# Altium PCB AU0002A.PcbDoc
Units mil, origin at the board's own origin, x right, y up, seen from the top; angles counter-clockwise.
Board outline 1379.39 x 1738.17 mil, 2 copper layers (Top Layer, Bottom Layer), stack 61.7 mil thick; 8 components, 6 nets, 25 pads, 3 vias.
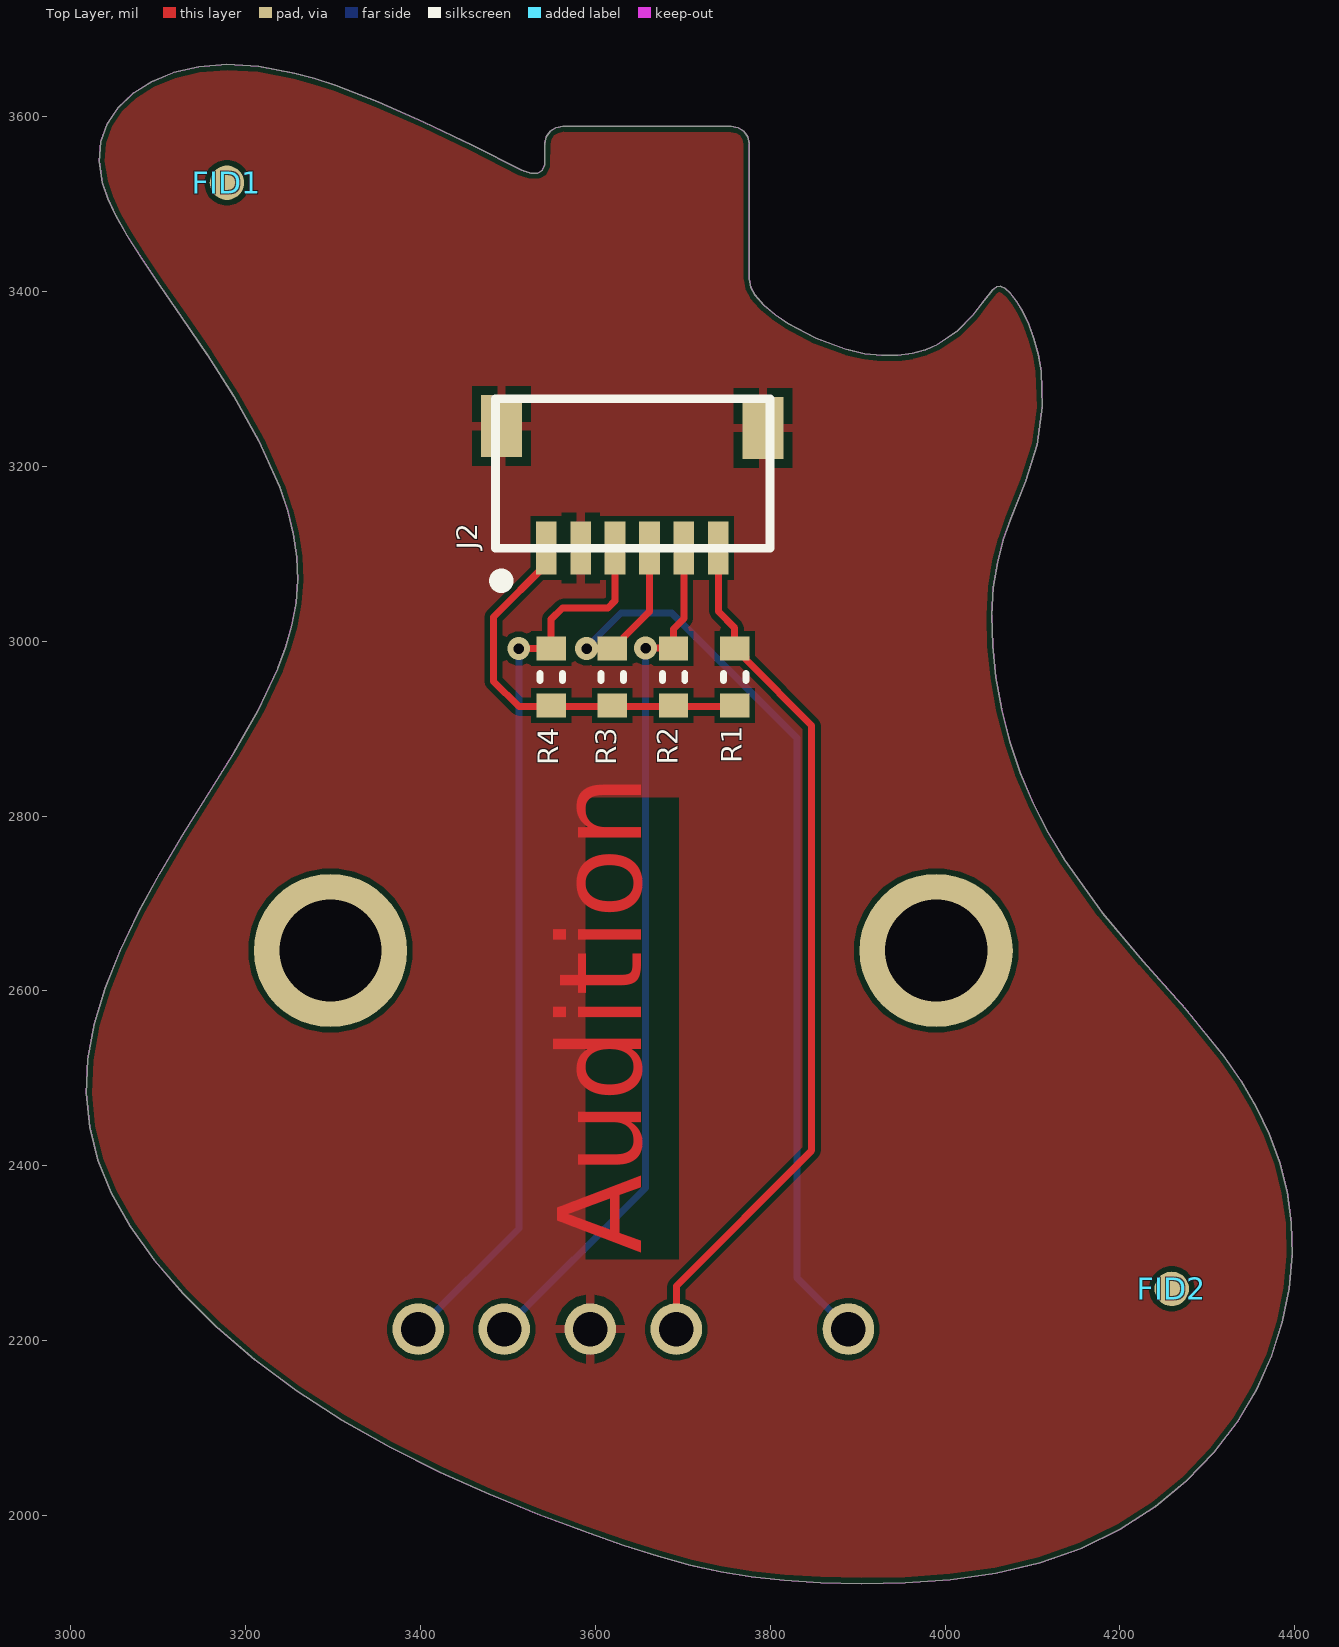
[diagram p0: Top Layer view]
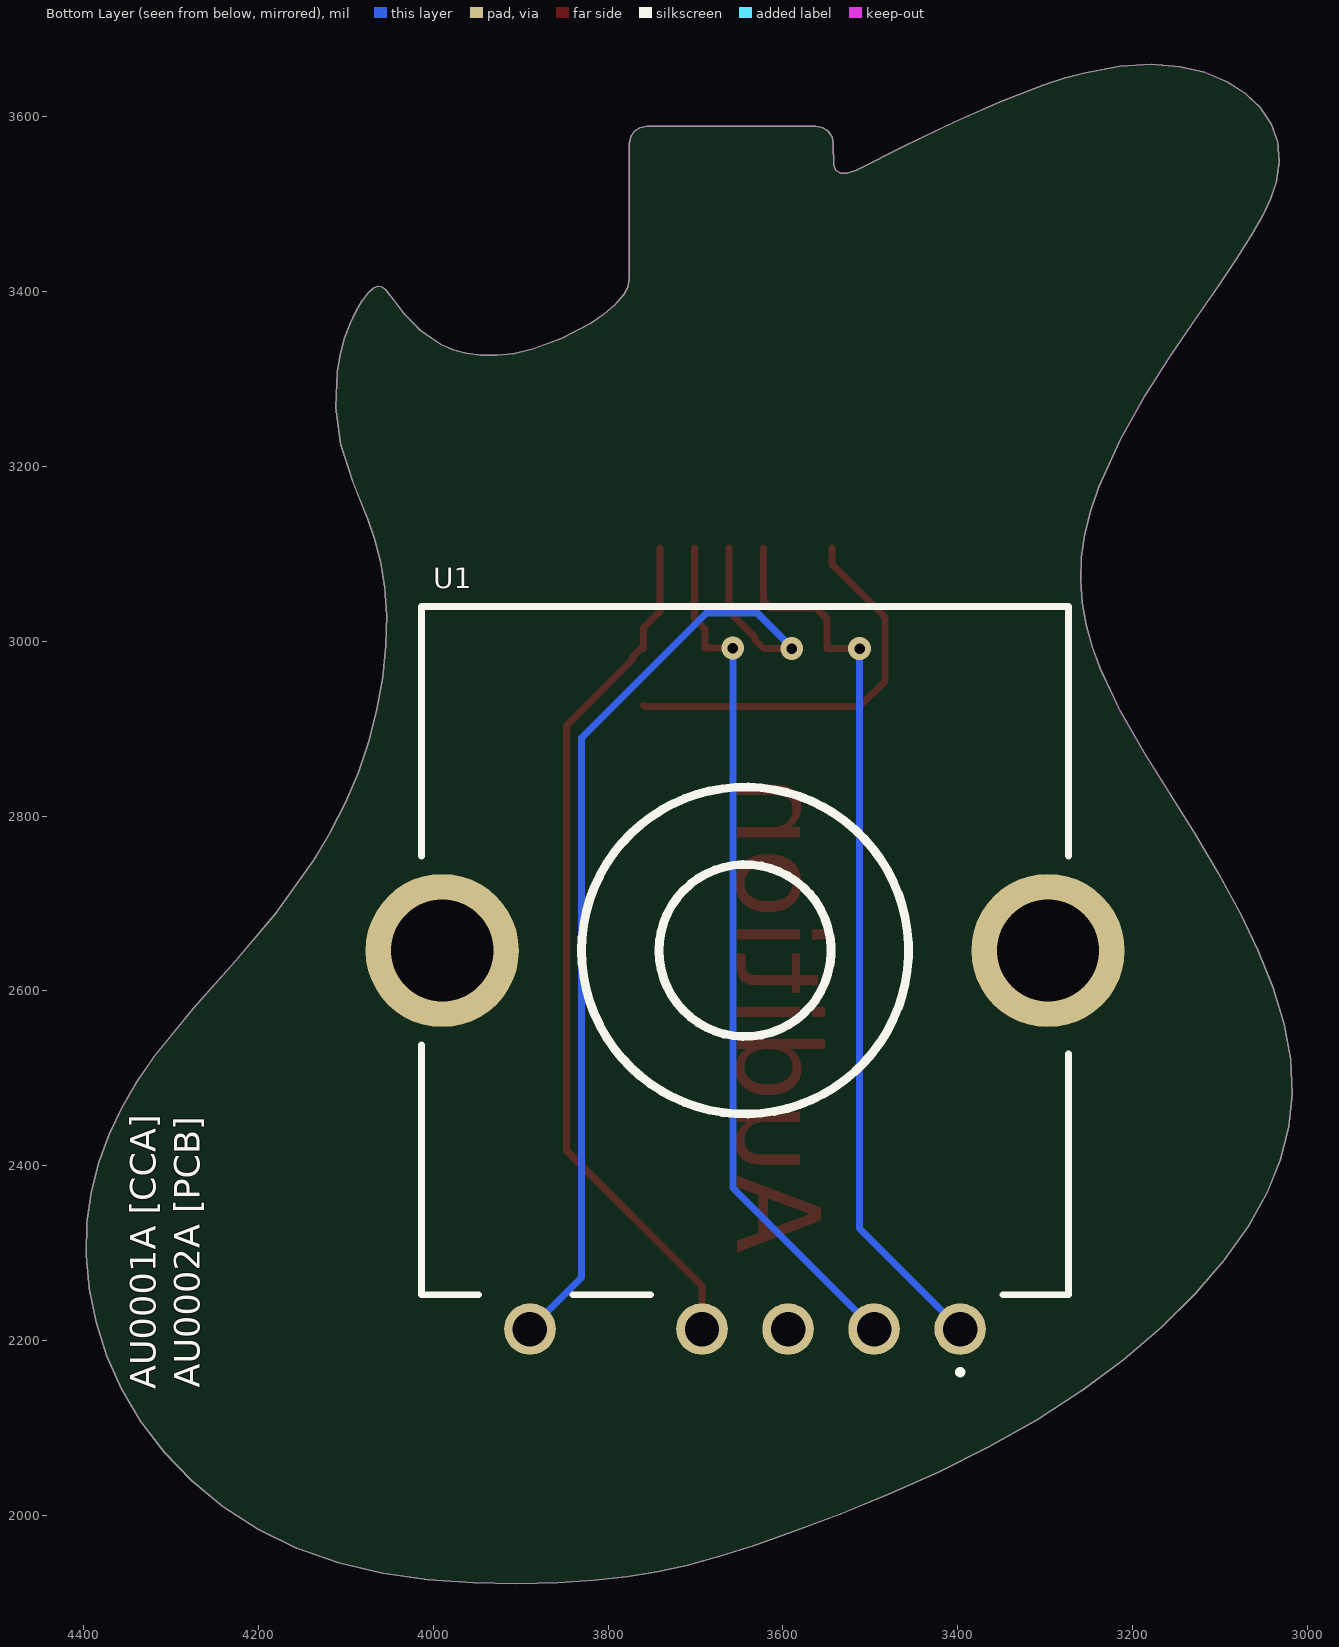
[diagram p1: Bottom Layer view, seen from below]
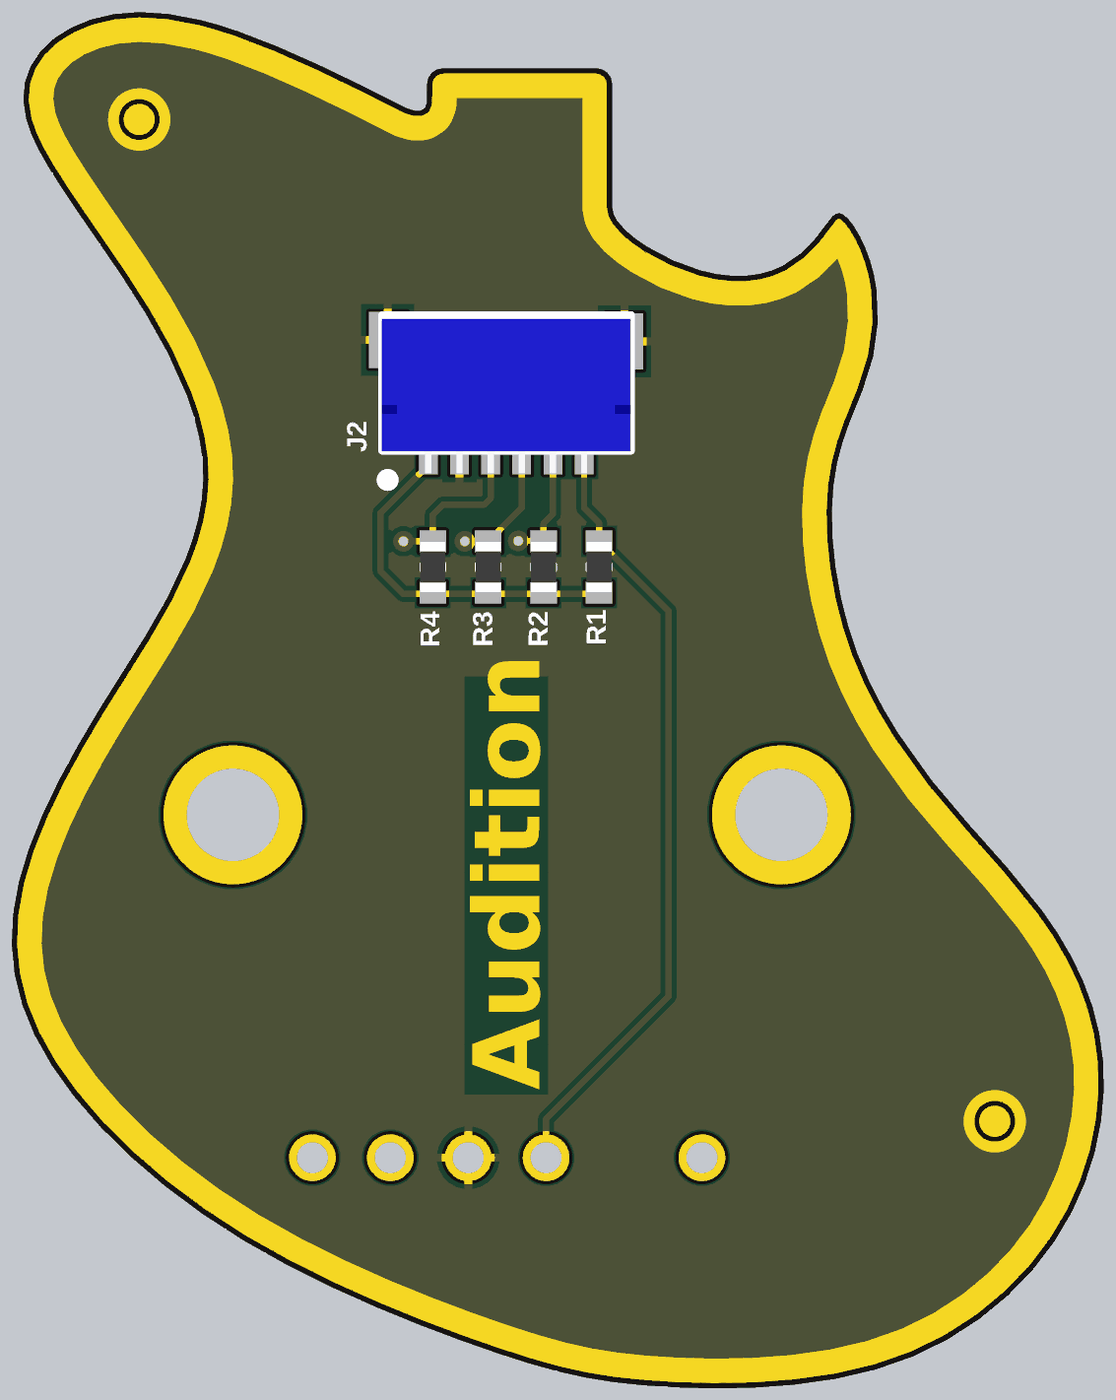
[diagram p2: 3D render of the assembled board from above, using the file's embedded part models]

## Layer stack, top to bottom
Top Solder: solder mask 0.4, Solder Resist, Dk 3.5
Top Layer: signal copper 1.4
Dielectric 1: dielectric 58.9, FR-4, Dk 4.8
Bottom Layer: signal copper 1.4
Bottom Solder: solder mask 0.4, Solder Resist, Dk 3.5

## Board outline
3030.82,2406.54 3021.28,2444.4 3017.48,2482.69 3019.29,2521.73 3026.58,2561.87 3039.04,2603.28 3056.06,2645.87 3077.02,2689.51 3101.26,2734.09 3128.16,2779.48 3186.39,2872.34 3213.8,2920 3236.77,2968.71 3245.81,2993.52 3252.82,3018.65 3257.47,3044.13 3259.45,3069.99 3258.47,3096.25 3254.43,3122.85 3247.68,3149.65 3238.58,3176.46 3214.87,3229.42 3186.31,3280.35 3155.93,3327.84 3126.75,3370.5 3101.47,3407.14 3080.67,3438.1 3064.05,3464.35 3051.26,3486.85 3041.97,3506.59 3035.88,3524.53 3032.13,3548.9 3034.09,3571.41 3041.42,3591.97 3053.78,3610.46 3070.83,3626.71 3092.19,3640.29 3117.47,3650.72 3146.27,3657.49 3178.42,3660.1 3214.59,3657.86 3255.69,3650.06 3278.37,3643.86 3302.61,3636.01 3351.12,3617.33 3403.81,3594.05 3459.2,3567.44 3515.84,3538.75 3526.38,3535.65 3534.22,3535.7 3539.35,3538.9 3541.77,3545.24 3542.13,3568.62 3542.11,3569.36 3543.72,3577.19 3548.12,3583.5 3554.59,3587.72 3562.41,3589.28 3563.54,3589.25 3755,3589.25 3755.39,3589.25 3763.25,3587.74 3769.77,3583.54 3774.21,3577.22 3775.84,3569.36 3775.83,3414.21 3777.67,3404.87 3782.12,3396.51 3792.5,3384.6 3805.17,3373.94 3819.77,3363.9 3852.52,3346.52 3887.22,3333.85 3908.08,3329.13 3927.58,3326.96 3945.68,3327.13 3962.35,3329.42 3977.55,3333.63 3991.25,3339.54 4014.22,3355.19 4031.84,3373.12 4044.74,3389.95 4054.33,3402.18 4058.73,3405.41 4063.37,3406.1 4068.59,3403.78 4074.72,3398.05 4081.55,3389.02 4088.62,3377.11 4095.45,3362.72 4101.58,3346.28 4106.53,3328.18 4109.88,3308.84 4111.35,3267.63 4105.54,3225.02 4092.3,3183.13 4074.96,3140.09 4066.74,3116.48 4059.91,3090.56 4055.27,3061.64 4053.38,3029.56 4054.28,2995.05 4057.98,2958.94 4064.46,2922.08 4073.74,2885.31 4085.81,2849.44 4100.52,2814.91 4117.57,2781.69 4136.64,2749.76 4179.59,2689.56 4226.73,2633.75 4274.48,2580.05 4318.84,2525.44 4338.52,2496.88 4355.96,2467.18 4370.8,2436.23 4382.68,2403.91 4391.22,2370.1 4396.06,2334.71 4396.88,2297.72 4393.46,2259.6 4385.67,2220.93 4373.34,2182.29 4356.31,2144.25 4334.43,2107.39 4307.65,2072.32 4276.19,2039.64 4240.29,2010.01 4200.2,1984.05 4156.19,1962.4 4108.49,1945.67 4057.91,1933.96 4005.95,1926.59 3954.18,1922.83 3904.19,1921.93 3857.55,1923.16 3815.73,1925.83 3778.35,1929.78 3743.36,1935.41 3708.66,1943.08 3672.14,1953.2 3631.72,1966.15 3585.52,1982.29 3534.02,2001.66 3478.97,2024.14 3422.12,2049.6 3365.22,2077.92 3310.03,2108.95 3258.14,2142.54 3210.27,2178.21 3166.85,2215.41 3128.31,2253.6 3095.1,2292.22 3067.63,2330.73 3046.22,2368.76

## Design rules (kind name [scope] priority, off if disabled: settings)
Clearance [All] p1: gap=6 ignorepadtopadclearanceinfootprint=FALSE
Height [All] p1: minheight=0 maxheight=3000 prefheight=500
PolygonConnect [All] p1: connectstyle=Relief reliefconductorwidth=10 reliefentries=4 polygonreliefangle="90 Angle" airgapwidth=10
RoutingVias [All] p1: holewidth=10 width=26 viastyle="Through Hole" minholewidth=10 minwidth=26 maxholewidth=28 maxwidth=50
SolderMaskExpansion [All] p1: expansion=4 istentingtop=FALSE
Width [All] p1: maxlimit=10 minlimit=6 preferedwidth=6
29 further rules are at their usual default settings.

## Components (designator, comment, footprint, x,y, rotation, side; value= is the part's Value field where it differs from the comment)
FID1 "PCB Fiducial" "Fiducial 1mm - 2mm"#1 3178.42,3524.53 r0 top
FID2 "PCB Fiducial" "Fiducial 1mm - 2mm"#2 4259.27,2259.25 r180 bottom
J2 "SM6B-SRSS-TB(LF)(SN)" SM06B-SRSS-TB(LF)(SN) 3642.06,3176.46 r180 top
R1 "10k" R0603_0.55MM_MD 3759.27,2959.25 r90 top
R2 "10k" R0603_0.55MM_MD 3689.27,2959.25 r90 top
R3 "10k" R0603_0.55MM_MD 3619.27,2959.25 r90 top
R4 "10k" R0603_0.55MM_MD 3549.27,2959.25 r90 top
U1 "PAC18R1-41D19F" PAC18R1 3643.27,2646.25 r180 bottom

## Footprints (in the part's own frame and the unit in brackets; to place one, negate y for a bottom-side part, rotate by r counter-clockwise, add the part's x,y. Pads: shape width x height; smd on the part's side, far side on the other; paste and mask are expansions set on the pad)
"Fiducial 1mm - 2mm"#1 [mm] "1mm Pad 2mm Opening"
  round 1 smd paste-10 mask+0.5: 1(0,0)
"Fiducial 1mm - 2mm"#2 [mm] "1mm Pad 2mm Opening"
  round 1 smd far side paste-10 mask+0.5: 1(0,0)
PAC18R1 [mm]
  round 1.5 hole 1: 1(6.25,-11) 2(-6.25,-11) 3(3.75,-11) 4(-1.25,-11) 5(1.25,-11)
  round 4.455 hole 2.97: MH1(8.8,0) MH2(-8.8,0)
  silkscreen extent -9.4,-12.3 9.4,10, body extent -10.35,-10.1 9.85,9.9, height 28.7
R0603_0.55MM_MD [mm] "Resistor 0603 Medium Density"
  rect 0.7x0.85 smd: 1(-0.825,0) 2(0.825,0)
  silkscreen extent -0.1,-0.33 0.1,0.33, body extent -0.8,-0.4 0.8,0.4, height 0.55
SM06B-SRSS-TB(LF)(SN) [mm] "CONN HEADR SH 6POS SIDE 1MM TIN"
  rect 0.6x1.55 smd: 1(-2.5,1.769) 2(-1.5,1.769) 3(-0.5,1.769) 4(0.5,1.769) 5(1.5,1.769) 6(2.5,1.769)
  rect 1.2x1.8 smd: M1(3.8,-1.769) M2(-3.8,-1.719)
  silkscreen extent -4,-2.56 3.97,2.77, body extent -4,-2.44 4,2.51, height 2.97

## Part data
FID1 FID2: library part Fiducial
J2: library part SM06B-SRSS-TB(LF)(SN), "6 Positions Header, Shrouded Connector 0.039\" (1.00mm) Surface Mount, Right Angle Tin", Colour=Natural, Contact Resistance=40mR, Current Rating=1A, Flammability Rating="UL94 V-0", Housing Colour=Beige, Insulation Resistance=100MR, Manufacturer=JST, Max Operating Temperature=85°C, Max Voltage Rating (AC)=50V, Min Operating Temperature=-25°C, Supplier Part Number 1=455-1806-1-ND, ComponentLink1Description=https://datasheet.ciiva.com/11752/0900766b8082f544-11752176.pdf, ComponentLink1URL=https://datasheet.ciiva.com/11752/0900766b8082f544-11752176.pdf, ComponentLink2Description=https://datasheet.ciiva.com/16217/sm06b-srss-tblfsn-16217552.pdf, ComponentLink2URL=https://datasheet.ciiva.com/16217/sm06b-srss-tblfsn-16217552.pdf, ComponentLink3Description=https://datasheet.ciiva.com/26894/getdatasheetpartid-490708-26894951.pdf, ComponentLink3URL=https://datasheet.ciiva.com/26894/getdatasheetpartid-490708-26894951.pdf, ComponentLink4Description=https://datasheet.ciiva.com/26894/getdatasheetpartid-639890-26894680.pdf, ComponentLink4URL=https://datasheet.ciiva.com/26894/getdatasheetpartid-639890-26894680.pdf, ComponentLink5Description=https://datasheet.ciiva.com/8052/91630-8052281.pdf, ComponentLink5URL=https://datasheet.ciiva.com/8052/91630-8052281.pdf, ComponentLink6Description=https://datasheet.ciiva.com/712/esr-712571.pdf, ComponentLink6URL=https://datasheet.ciiva.com/712/esr-712571.pdf, ComponentLink7Description=https://datasheet.ciiva.com/712/esr-712572.pdf, ComponentLink7URL=https://datasheet.ciiva.com/712/esr-712572.pdf, ComponentLink8Description=https://datasheet.ciiva.com/730/esr-730671.pdf, ComponentLink8URL=https://datasheet.ciiva.com/730/esr-730671.pdf, Connector Type="Male Pin", Contact Material="Copper,Copper Alloy", Contact Plating=Copper,Tin,Lead, Depth=4.95mm, Gender=Male, Housing Material=Polyamide, Lead Free="Lead Free", Lead Pitch=1mm, Length=8mm, Manufacturer Part Number=SM06B-SRSS-TB(LF)(SN), Material=Polyamide, Max Current Rating=1A, Max Voltage Rating (DC)=50V, Mount="Surface Mount", Number of Contacts=6, Number of Positions=6, Number of Rows=1, Orientation="Right Angle", Packaging="Tape and Reel", Pitch=1mm, Pricing 1="1=0.83, 10=0.782, 100=0.5996, 500=0.5214, 1000=0.4301 (USD)", REACH SVHC="No SVHC", Stock 1=40560, Supplier 1=Digi-Key, Termination=Solder, Voltage Rating=50V, Voltage Rating (AC)=50V
R1 R2 R3 R4: library part ERJ-3EKF1002V, "RES 10K OHM 1/10W 1% 0603 SMD", Limiting Element Voltage=75, Manufacturer="Panasonic Electronic Components", Maximum Overload Voltage=150, Maximum Working Voltage=31.6V, Package="0603 (1608 Metric)", Package Power="0603  (0.1W)", Power (Watts)="0.1W- 1/10W", Ratings=AEC-Q200, Sort Value=10000, Sort Value Package=603_10000, Supplier Package=0603, Supplier Part Number 1=P10.0KHCT-ND, Temperature Coefficient=±100ppm/°C, Tolerance=±1%, Category=Resistors, ComponentLink1Description="Internal Datasheet", ComponentLink1URL="datasheets\Panasonic Electronic Components\AOA0000CE2.pdf", ComponentLink2Description="External Datasheet", ComponentLink2URL=http://industrial.panasonic.com/www-data/pdf/AOA0000/AOA0000CE2.pdf, Composition="Thick Film", Features=-, Height=0.55MM, Manufacturer Part Number=ERJ-3EKF1002V, Number of Terminations=2, Packaging="Cut Tape (CT)", Resistance (Ohms)=10k, Size / Dimension="0.063\" L x 0.031\" W (1.60mm x 0.80mm)", Substitution Notes="10k , ±1% , 0603 , AEC-Q200", Supplier 1=Digi-Key
U1: Manufacturer=Bourns, Supplier Part Number 1=652-PAC18R1-41D19F, Manufacturer Part Number=PAC18R1-41D19F, Pricing="1=3.26000, 10=3.04000, 50=2.60000, 100=2.45000, 1000=2.00000, 10000=1.91000 (USD)", RoHS=No, Stock 1=1877, Supplier 1=Mouser

## Via types
v1: diameter 26, hole 12, Top Layer to Bottom Layer, tented both sides, 3 vias

## Nets (pads, with @x,y where several pads share a name; then routed paths per layer and width w, separated by ;. In a path a pad name is that pad's centre, name@x,y a point inside that pad or via, vN(x,y) a via of type N, cw(c..) or ccw(c..) an arc to the next point about the centre after c; other vN are vias at no path point)
+IO: J2.6 R1.1 R2.1 R3.1 R4.1 | length 466.2
  Top Layer w8: J2.6 3543.64,3088.12 3483.27,3027.75 3483.27,2954.25 3512.27,2925.25 3757.75,2925.25 R1.1
COMMON: J2.5 J2.M1 J2.M2 U1.5
P0: J2.1 R1.2 U1.4 | length 1003.7
  Top Layer w8: U1.4 3692.48,2262.46 3847.27,2417.25 3847.27,2903.73 3772,2979 3772,2981.95 3762.22,2991.73 R1.2 3759.27,3015.25 3740.49,3034.03 J2.1
P1: J2.2 R2.2 U1.3 | length 998.2
  Top Layer w8: v1(3657.27,2992.25) 3688.75,2992.25 R2.2 3689.27,3014.25 3701.12,3026.1 J2.2
  Bottom Layer w8: U1.3 3657.27,2374.82 v1(3657.27,2992.25)
P2: J2.3 R3.2 U1.2 | length 1181.2
  Top Layer w8: v1(3589.79,2991.73) R3.2 3622.22,2991.73 3632,3001.51 3632,3004.46 3661.75,3034.21 J2.3
  Bottom Layer w8: v1@3589.27,2992.25 3629.27,3032.25 3687.27,3032.25 3830.27,2889.25 3830.27,2272.24 U1.2
P3: J2.4 R4.2 U1.1 | length 1039
  Top Layer w8: v1(3512.27,2991.73) R4.2 3549.27,3025.25 3562.27,3038.25 3614.27,3038.25 3622.38,3046.36 J2.4
  Bottom Layer w8: U1.1 3512.27,2328.24 v1(3512.27,2991.73)
pads on no net: FID1.1 FID2.1 U1.MH1 U1.MH2

## Polygon pours and split planes (outlines as drawn)
COMMON on Top Layer "GND_L01_P002" (solid, remove dead copper, pour order 2): 4723.27,3808.25 4723.27,1841.25 2544.27,1841.25 2544.27,3808.25
no net on Bottom Layer "NONET_L02_P003" (solid, remove dead copper, pour order 3): 4723.53,3808 4723.53,1841 2544.53,1841 2544.53,3808

## Keep-outs
Keep-Out Layer:
  the board outline again, w1

## Other copper
Top Layer:
  text "Audition" at 3683.54,2299.14 h165 r90

## Silkscreen, mask and mechanical layers (free items; w line width, h text height)
Bottom Overlay:
  text "AU0002A [PCB]" at 4257.27,2146.25 h50 r270
  text "AU0001A [CCA]" at 4307.65,2144.25 h50 r270
Top Solder:
  drawing of 155 lines, arcs and shapes, not listed
  text "Audition" at 3683.54,2299.14 h165 r90